# Altium PCB WheelBoard.PcbDoc
Units mil, origin at the board's own origin, x right, y up, seen from the top; angles counter-clockwise.
Board outline 1968.5 x 1181.1 mil, 2 copper layers (Top Layer, Bottom Layer); 35 components, 24 nets, 140 pads, 71 vias.
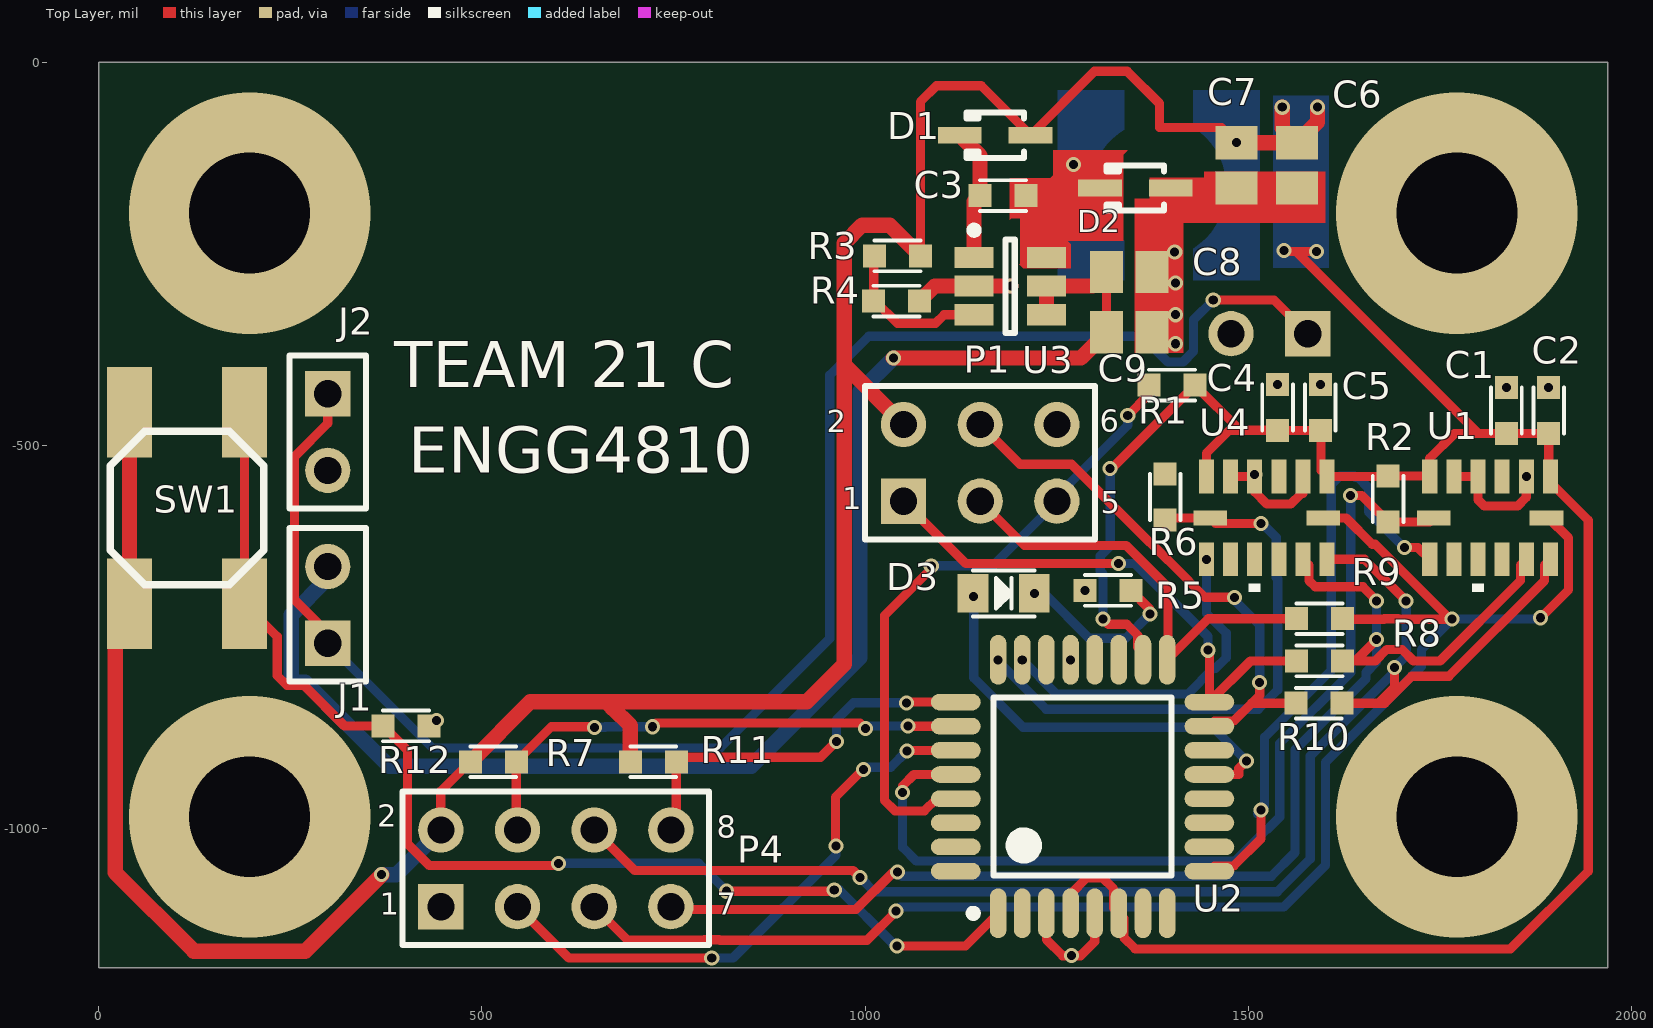
[diagram p0: Top Layer view]
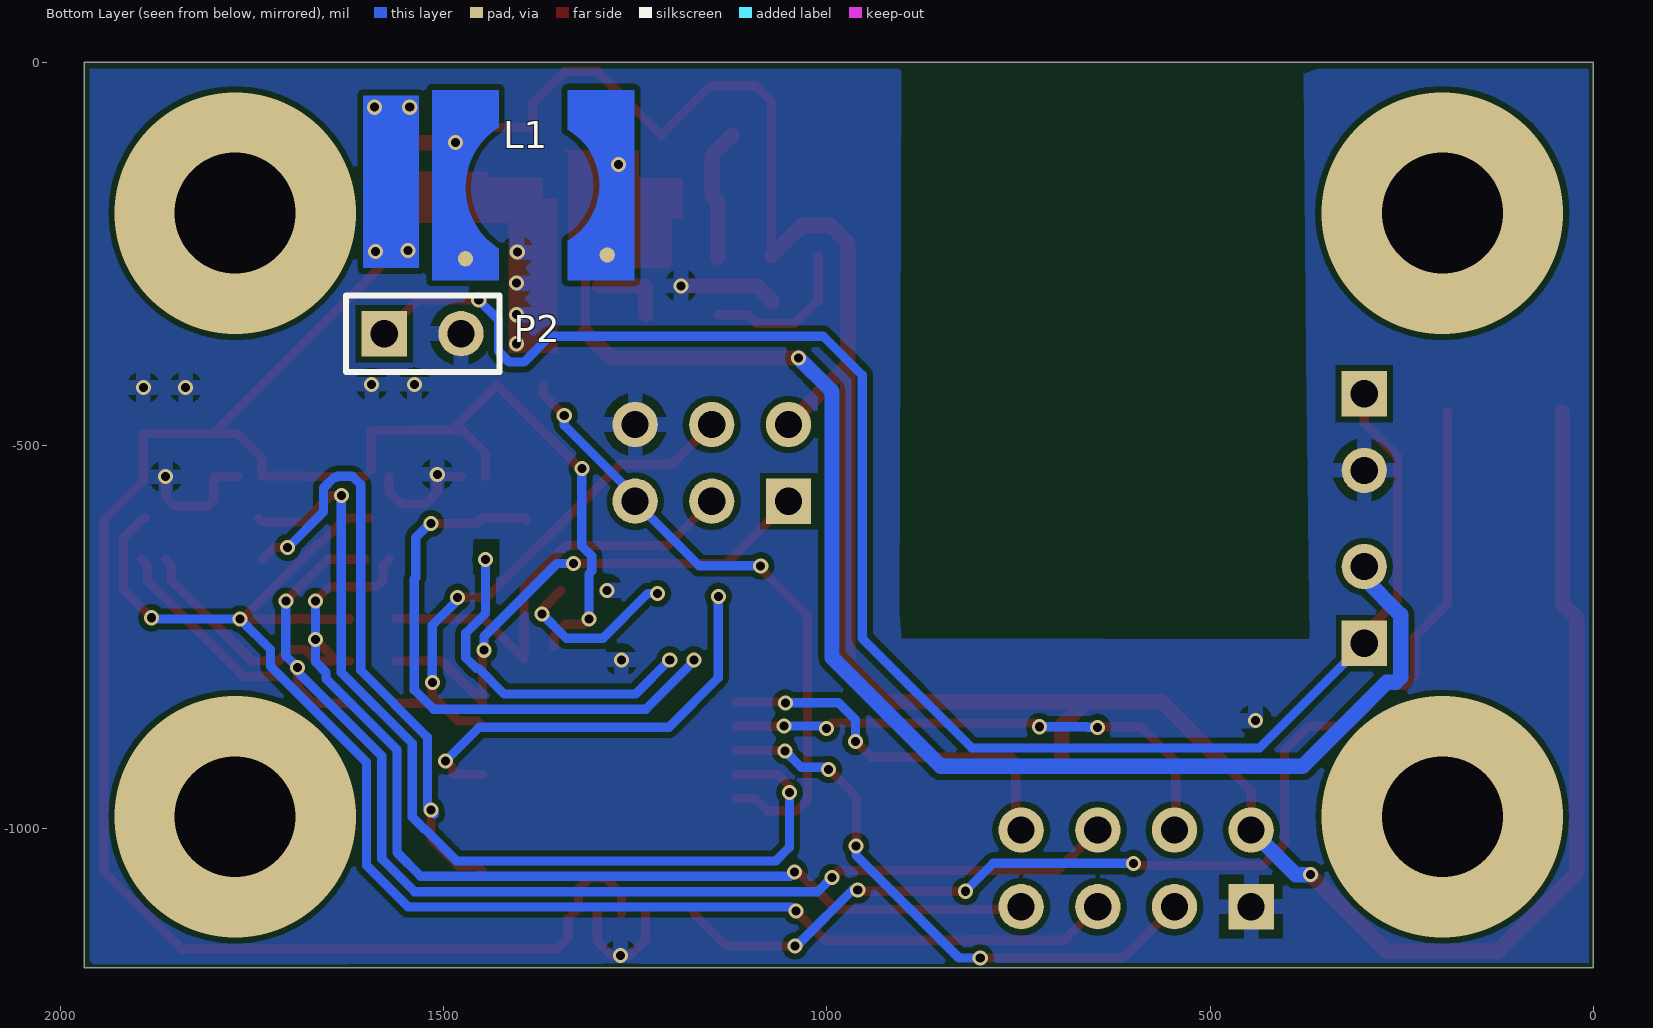
[diagram p1: Bottom Layer view, seen from below]

## Layer stack, top to bottom
Top Layer: signal copper 1.4
Dielectric: dielectric 12.6, FR-4, Dk 4.8
Bottom Layer: signal copper 1.4

## Board outline
0,-1181.1 0,0 1968.5,0 1968.5,-1181.1

## Design rules (kind name [scope] priority, off if disabled: settings)
Clearance [All] p1: gap=7.87
HoleSize [All] p1: absolutevalues=TRUE maxlimit=160 minlimit=11.81 maxpercent=80.000 minpercent=20.000
HoleToHoleClearance [All] p1: gap=5.91 allowstackedmicrovias=TRUE
MinimumSolderMaskSliver [All] p1: minsoldermaskwidth=0.39
PolygonConnect [All] p1: connectstyle=Relief reliefconductorwidth=19.68 reliefentries=4 polygonreliefangle="90 Angle" airgapwidth=11.81
RoutingVias [All] p1: holewidth=11.81 width=19.68 viastyle="Through Hole" minholewidth=11.81 minwidth=19.68 maxholewidth=98.43 maxwidth=118.11
SilkToSilkClearance [All] p1: silktosilkclearance=0.39
SilkToSolderMaskClearance [IsPad] p1: minsilkscreentomaskgap=3.94 clearancetoexposedcopper=TRUE
SolderMaskExpansion [All] p1: expansion=4
Width [All] p1: maxlimit=78.74 minlimit=10 preferedwidth=11.81
23 further rules are at their usual default settings.

## Components (designator, comment, footprint, x,y, rotation, side; value= is the part's Value field where it differs from the comment)
C1 "Cap" 0603E 1836.26,-484.32 r90 top
C2 "Cap" 0603E 1891.37,-484.32 r90 top
C3 "Cap" 0603E 1149.62,-173.92 r0 top
C4 "Cap" 0603E 1537.67,-480.22 r90 top
C5 "Cap" 0603E 1593.48,-480.34 r90 top
C6 "Cap" C0805 1563,-134.55 r90 top
C7 "Cap" C0805 1484.26,-134.55 r90 top
C8 "Cap" C0805 1344.23,-273.66 r0 top
C9 "Cap" C0805 1344.23,-352.4 r0 top
D1 "1SS404" SOD-323 1169.3,-95.18 r180 top
D2 "1SS404" SOD-323 1352.23,-164.05 r180 top
D3 "DIODE" D0805E 1220.47,-692.91 r180 top
J1 "Current J1" HDR1X2 298.79,-757.86 r90 top
J2 "Voltage J2" HDR1X2 298.79,-432.42 r270 top
L1 "Inductor" 5828-INDUCTOR 1251.18,-36.45 r270 bottom
P1 "ISP" HDR2X3 1049.85,-572.61 r0 top
P2 "Power" HDR1X2 1577.05,-354.15 r180 bottom
P4 "NRF Board" HDR2X4 446.33,-1101.54 r0 top
R1 "Res1" 0603E 1370.08,-421.26 r0 top
R2 "Res1" 0603E 1681.98,-539.8 r270 top
R3 "Res1" 0603E 1011.82,-252.66 r0 top
R4 "Res1" 0603E 1070.88,-311.72 r180 top
R5 "Res1" 0603E 1346.46,-688.98 r180 top
R6 "Res1" 0603E 1391.17,-536.96 r270 top
R7 "Res1" 0603E 544.75,-912.56 r180 top
R8 "Res1" 0603E 1562.42,-781.04 r0 top
R9 "Res1" 0603E 1562.42,-725.93 r0 top
R10 "Res1" 0603E 1621.47,-836.16 r180 top
R11 "Res1" 0603E 753.41,-912.56 r180 top
R12 "Res1" 0603E 370.99,-865.8 r0 top
SW1 "SW-SPST" "Switch - SMD" 215.15,-681.5 r90 top
U1 "ADXL375BCCZ" LGA_CC-14-1 1814.96,-594.49 r270 top
U2 "ATmega328-AU" 32A_N 1283.46,-944.88 r90 top
U3 "Buck" SOT23-6 1188.99,-292.03 r0 top
U4 "ADXL375BCCZ" LGA_CC-14-1 1523.62,-594.49 r270 top

## Footprints (in the part's own frame and the unit in brackets; to place one, negate y for a bottom-side part, rotate by r counter-clockwise, add the part's x,y. Pads: shape width x height; smd on the part's side, far side on the other; paste and mask are expansions set on the pad)
32A_N [mm] "Thin QFP, 32-Leads, Body 7x7mm, Pitch 0.8mm, IPC Medium Density"
  oval 1.65x0.55 smd: 1(-4.2,2.8) 2(-4.2,2) 3(-4.2,1.2) 4(-4.2,0.4) 5(-4.2,-0.4) 6(-4.2,-1.2) 7(-4.2,-2) 8(-4.2,-2.8) 17(4.2,-2.8) 18(4.2,-2) 19(4.2,-1.2) 20(4.2,-0.4) 21(4.2,0.4) 22(4.2,1.2) 23(4.2,2) 24(4.2,2.8)
  oval 0.55x1.65 smd: 9(-2.8,-4.2) 10(-2,-4.2) 11(-1.2,-4.2) 12(-0.4,-4.2) 13(0.4,-4.2) 14(1.2,-4.2) 15(2,-4.2) 16(2.8,-4.2) 25(2.8,4.2) 26(2,4.2) 27(1.2,4.2) 28(0.4,4.2) 29(-0.4,4.2) 30(-1.2,4.2) 31(-2,4.2) 32(-2.8,4.2)
  silkscreen extent -4.32,-2.95 2.95,3.75, body extent -3.5,-3.5 3.5,3.5, height 1.2
0603E [mil]
  rect 30x30 smd: 1(0,0) 2(60,0)
  silkscreen extent 0,-20 60,20
5828-INDUCTOR [mil]
  round 20 smd: 1(215,-35) 2(220,-220)
  Top Layer region: 0,-86.61 0,0 248.03,0 248.03,-86.61 196.61,-86.61 165.86,-56.14 124.02,-44.99 82.17,-56.14 51.42,-86.61 51.42,-86.61
  Top Layer region: 0,-263.23 0,-176.61 48.39,-176.61 82.31,-208.65 127.5,-220.3 172.69,-208.65 206.61,-176.61 206.61,-176.61 248.03,-176.61 248.03,-263.23
C0805 [mm] "Chip Capacitor, Body 2.0x1.3mm, IPC High Density"
  rect 1.1x1.4 smd: 1(-0.75,0) 2(0.75,0)
  body extent -1.1,-0.72 1.1,0.72, height 1.4
D0805E [mil]
  rect 40x50 smd: A(80,0) K(0,0)
  silkscreen extent 0,-30 80,30
HDR1X2 [mm] "Connector; Header; 2 Position"
  rect 1.5x1.5 hole 0.9: 1(0,0)
  round 1.5 hole 0.9: 2(2.54,0)
  silkscreen extent -1.27,-1.27 3.81,1.27
HDR2X3 [mm] "Connector; Header; 3x2 Position"
  rect 1.5x1.5 hole 0.9: 1(0,0)
  round 1.5 hole 0.9: 2(0,2.54) 3(2.54,0) 4(2.54,2.54) 5(5.08,0) 6(5.08,2.54)
  silkscreen extent -1.27,-1.27 6.35,3.81
HDR2X4 [mm] "Connector; Header; 4x2 Position"
  rect 1.5x1.5 hole 0.9: 1(0,0)
  round 1.5 hole 0.9: 2(0,2.54) 3(2.54,0) 4(2.54,2.54) 5(5.08,0) 6(5.08,2.54) 7(7.62,0) 8(7.62,2.54)
  silkscreen extent -1.27,-1.27 8.89,3.81
LGA_CC-14-1 [mm]
  rect 1.118x0.5 smd mask+0.025: 1(-1.371,2) 2(-1.371,1.2) 3(-1.371,0.4) 4(-1.371,-0.4) 5(-1.371,-1.2) 6(-1.371,-2) 8(1.371,-2) 9(1.371,-1.2) 10(1.371,-0.4) 11(1.371,0.4) 12(1.371,1.2) 13(1.371,2)
  rect 0.5x1.118 smd mask+0.025: 7(0,-1.871) 14(0,1.871)
  silkscreen extent 2.18,-0.59 2.44,-0.21
SOD-323 [mm] "SOD-323/SC-76; 2 Leads; Body 1.7 x 1.3 mm, (LxW)"
  rect 1.45x0.55 smd: 1(1.175,0) 2(-1.175,0)
  silkscreen extent -0.95,-0.75 0.95,0.75
SOT23-6 [mm]
  rect 1.3x0.7 smd: 1(-1.2,0.95) 2(-1.2,0) 3(-1.2,-0.95) 4(1.2,-0.95) 5(1.2,0) 6(1.2,0.95)
  silkscreen extent -1.32,-1.55 0.15,1.97, body extent -0.9,-1.55 0.9,1.55
"Switch - SMD" [mm]
  rect 3x1.5 smd: 1(-0.635,0.635) 1(5.715,0.635) 2(-0.635,4.445) 2(5.715,4.445)
  silkscreen extent 0,0 5.08,5.08

## Part data
C1 C2 C3 C4 C5 C6 C7 C8 C9: "Capacitor"
D1 D2: library part BA592, "Silicon RF Switching Diode for VHF Band Switching in TV/VTR Tuners"
D3: "Diode"
J1 J2 P2: library part "Header 2", "Header, 2-Pin"
P1: library part "Header 3X2", "Header, 3-Pin, Dual row"
P4: library part "Header 4X2", "Header, 4-Pin, Dual row"
R1 R2 R3 R4 R5 R6 R7 R8 R9 R10 R11 R12: "Resistor"
U1 U4: library part ADXL345BCCZ, "Imported"
U2: "8-bit AVR Microcontroller, 32KB Flash, 1KB EEPROM, 2KB SRAM, 32-pin TQFP, Industrial Grade (-40°C to 85°C)"
U3: library part Component_1

## Via types
v1: diameter 19.68, hole 11.81, Top Layer to Bottom Layer, 67 vias
v2: diameter 314.96, hole 157.48, Top Layer to Bottom Layer, 4 vias

## Nets (pads, with @x,y where several pads share a name; then routed paths per layer and width w, separated by ;. In a path a pad name is that pad's centre, name@x,y a point inside that pad or via, vN(x,y) a via of type N, cw(c..) or ccw(c..) an arc to the next point about the centre after c; other vN are vias at no path point)
ADXL_CSN: R6.2 U2.24 U4.7 | length 759.4
  Top Layer w12: R6.2 1393.64,-594.49 U4.7 1457.16,-601.69 v1(1516.28,-601.69)
  Bottom Layer w12: v1(1173.23,-779.53) 1173.23,-781.57 1235.78,-844.13 1512.75,-844.13 1538.1,-818.78 1538.1,-674.3 1536.13,-672.33 1536.13,-620.05 1517.76,-601.69 v1(1516.28,-601.69)
ADXL_CSN2: R2.2 U1.7 U2.28 | length 1262.2
  Top Layer w12: v1(1048.62,-952.86) 1048.62,-943.94 1063.42,-929.13 U2.28 ; v1(1632.62,-565.26) 1647.44,-565.26 R2.2 1735.99,-599.8 U1.7
  Bottom Layer w12: v1(1048.62,-952.86) 1048.62,-1024.23 1066.38,-1041.99 1482.56,-1041.99 1524.44,-1000.11 1525.17,-1000.11 1540.68,-984.6 1540.68,-888.58 1633.14,-796.11 1633.14,-565.78 v1(1632.62,-565.26)
ADXL_IRQ: U2.23 U4.8 | length 446.9
  Bottom Layer w12: v1(1204.72,-779.53) 1249.45,-824.25 1420.49,-824.25 1454.01,-790.74 1456.79,-790.74 1470.68,-776.85 1470.68,-744.73 1444.88,-718.93 v1(1444.88,-648.46) ; v1@1445,-648.46 v1@1445,-644.79
ADXL_IRQ2: U1.8 U2.9 | length 787.2
  Top Layer w12: U2.9 1455.61,-1048.32 1480.7,-1048.32 1516.15,-1012.87 v1(1516.15,-975.58) ; v1(1703.19,-633.19) 1720.95,-633.19 U1.8
  Bottom Layer w12: v1@1511.5,-980.24 v1(1516.15,-975.58) 1520.8,-970.93 1520.8,-880.35 1607.87,-793.28 1607.87,-551.04 1618.93,-539.98 1638.26,-539.98 1639.82,-541.54 1642.45,-541.54 1656.34,-555.43 1656.34,-586.34 v1(1703.19,-633.19)
GND: C1.2 C2.2 C4.2 C5.2 C6.1 C7.1 C8.2 C9.2 D2.2 J2.2 P1.6 P2.2 P4.1 R4.1 R5.2 R12.2 U1.2 U1.4 U1.5 U2.3 U2.5 U2.21 U3.2 U4.2 U4.4 U4.5 | length 589
  Top Layer w12: U2.3@1236.22,-1107.24 U2.3 1236.22,-1144.36 1257.32,-1165.46 1280.68,-1165.46 1299.21,-1146.93 U2.5 ; U4.5 U4.4 1507.87,-560.49 1523.78,-576.39 1554.96,-576.39 1568.64,-562.71 1570.87,-562.71 U4.2 ; U1.5 U1.4 1799.21,-570.85 1807.22,-578.86 1850.91,-578.86 1862.2,-567.57 v1(1862.2,-540.52)
  Top Layer w20: R4.1 1090.56,-292.03 U3.2 v1@1189.76,-292.03
  other v1: 1269,-1165.46 440.82,-858.65 1267.72,-779.53 1286.46,-688.98 1507.93,-537.68 1836.26,-424.32 1891.37,-424.32 1537.67,-420.22 1593.48,-420.34 1404.46,-367.27 1404.46,-329.4 1190.06,-291.73 1404.63,-288.24 1403.57,-247.69
MISO: P1.1 R8.1 U2.16 | length 692.3
  Top Layer w12: P1.1 1131.19,-653.96 v1(1330.19,-653.96) ; v1(1446.97,-767.02) 1448.82,-768.87 U2.16 1502.42,-781.04 R8.1
  Bottom Layer w12: v1(1330.19,-653.96) 1351.8,-653.96 1446.97,-749.12 v1(1446.97,-767.02)
MISO_ISO: P4.7 R8.2 U1.12 U4.12 | length 1710
  Top Layer w12: P4.7@748.07,-1103.28 749.95,-1105.16 987.74,-1105.16 1036.68,-1056.22 v1(1041.96,-1056.22) ; U4.12 1578.65,-656.24 1578.65,-676.21 1586.77,-684.34 1649.01,-684.34 1667.19,-702.52 v1(1666.79,-702.92) ; R8.2 1638.92,-781.04 ; v1(1666.79,-753.17) 1638.92,-781.04 ; U1.12 1854.43,-656.24 1854.43,-676.21 1749.59,-781.04 1715.04,-781.04 1699.94,-765.94 1680.3,-765.94 1665.2,-781.04 1638.92,-781.04
  Bottom Layer w12: v1(1041.96,-1056.22) 1047.6,-1061.86 1529.66,-1061.86 1560.55,-1030.97 1560.55,-896.81 1653.02,-804.34 1653.02,-796.01 1666.79,-782.24 v1(1666.79,-753.17) v1(1666.79,-702.92)
MOSI: P1.4 R10.2 U2.15 | length 702.6
  Top Layer w12: P1.4 1201.67,-524.44 1269.02,-524.44 1370.42,-625.84 1371.07,-625.84 1421.17,-675.93 1421.17,-676.21 1442.97,-698.02 v1(1481.47,-698.02) ; U2.15 1455.61,-859.35 1480.7,-859.35 1503.89,-836.16 ; v1(1514.38,-808.96) 1514.38,-825.67 1503.89,-836.16 ; R10.2 1503.89,-836.16
  Bottom Layer w12: v1@1481.47,-701.73 1514.38,-734.64 v1(1514.38,-808.96)
MOSI_ISO: P4.6 R10.1 U1.13 U4.13 | length 1915.8
  Top Layer w12: P4.6 699.13,-1054.34 984,-1054.34 v1(992.98,-1063.32) ; U4.13 1651.02,-648.46 v1(1705.47,-702.92) ; R10.1 1669.34,-836.16 ; v1(1690.12,-789.66) 1690.12,-815.38 1669.34,-836.16 ; U1.13 1885.92,-656.24 1885.92,-676.21 1761.22,-800.92 1712.66,-800.92 1677.41,-836.16 1669.34,-836.16
  Bottom Layer w12: v1(992.98,-1063.32) 1011.8,-1082.14 1537.49,-1082.14 1580.43,-1039.2 1580.43,-905.04 1690.12,-795.35 v1(1690.12,-789.66) 1705.47,-774.31 v1(1705.47,-702.92)
NetC3_1: C3.1 D1.1 U3.1 | length 173.7
  Top Layer w20: D1.1 1149.62,-121.76 C3.1 1141.74,-181.8 U3.1
NetC3_2: C3.2 D2.1 L1.1 U3.6
  other v1: 1271.3,-133.29
NetD3_A: D3.A U2.13 | length 566.9
  Top Layer w12: U2.13 1487.1,-929.13 1487.1,-921.27 v1(1496.97,-911.39)
  Bottom Layer w12: v1(1141.38,-696.71) 1141.38,-803.02 1205.77,-867.41 1452.98,-867.41 v1(1496.97,-911.39)
NetD3_K: D3.K R5.1 | length 229.4
  Top Layer w12: R5.1 1371.29,-713.81 v1(1371.29,-719.8)
  Bottom Layer w12: v1(1220.47,-692.91) 1233.25,-692.91 1291.86,-751.52 1339.57,-751.52 v1(1371.29,-719.8)
NetR3_1: R3.1 R4.2 U3.3 | length 205.6
  Top Layer w12: R3.1@1010.88,-253.61 R4.2 1013.13,-311.72 1042,-340.59 1091.63,-340.59 1102.78,-329.43 U3.3
NetR12_1: R12.1 SW1.1 U2.1 | length 1529.5
  Top Layer w12: SW1.1@190.15,-456.5 190.15,-706.5 232.9,-749.24 232.9,-800.12 245.68,-812.9 267.83,-812.9 320.73,-865.8 R12.1 402.92,-897.73 402.92,-1019.52 431.24,-1047.83 597.02,-1047.83 v1(599.87,-1044.98) ; v1(819.07,-1081.44) v1@954.61,-1081.44 ; v1@957.99,-1078.06 v1(959.5,-1079.57) ; v1(1041.5,-1152.65) 1130.81,-1152.65 U2.1
  Bottom Layer w12: v1(599.87,-1044.98) 782.61,-1044.98 v1(819.07,-1081.44) ; v1(959.5,-1079.57) 966.08,-1079.57 1034.84,-1148.33 v1@1034.84,-1149.33
NRF_CE: P4.3 U2.27 | length 754.6
  Top Layer w12: P4.3 613.29,-1168.51 v1(799.66,-1168.51) ; v1@961,-1021.4 961,-958.82 v1(997.39,-922.43) ; v1@1055.21,-897.64 U2.27
  Bottom Layer w12: v1(799.66,-1168.51) 827.43,-1168.51 961.87,-1034.07 v1(961.87,-1022.27) ; v1(997.39,-922.43) 1000.26,-919.56 1033.29,-919.56 v1(1054.36,-898.49)
NRF_CSN: P4.4 R7.1 U2.26 | length 686.8
  Top Layer w12: P4.4 544.75,-999.97 R7.1 590.49,-866.83 v1@645.9,-866.83 ; v1(722.39,-866.83) 727.09,-862.13 993.02,-862.13 v1(1000.09,-869.2) ; v1(1055.66,-865.8) 1056,-866.14 U2.26
  Bottom Layer w12: v1(646.68,-867.6) 660.39,-867.6 ; 661.17,-866.83 v1(722.39,-866.83) ; v1(1000.09,-869.2) 1003.49,-865.8 v1(1055.66,-865.8)
NRF_IRQ: P4.8 R11.1 U2.25 | length 503.9
  Top Layer w12: P4.8 753.41,-994.45 R11.1 759.31,-906.66 941.55,-906.66 v1(962.36,-885.85) ; v1@1054.84,-834.65 U2.25
  Bottom Layer w12: v1(962.36,-885.85) 962.36,-857.89 984.65,-835.61 v1(1053.88,-835.61)
RST: P1.5 R1.1 U2.29 | length 825.7
  Top Layer w12: v1@1086.05,-660.76 1024.9,-721.91 1024.9,-962.69 1038.79,-976.58 1077.07,-976.58 1093.02,-960.63 U2.29 ; v1(1342.3,-461.03) 1370.08,-433.26 R1.1
  Bottom Layer w12: v1(1086.05,-656.92) 1166.43,-656.92 P1.5@1249.85,-573.5 ; P1.5@1249.85,-566.02 1342.3,-473.56 v1(1342.3,-461.03)
SCK: P1.3 R9.1 U2.17 | length 573.9
  Top Layer w12: P1.3 1207.48,-630.24 1340.01,-630.24 1395.01,-685.24 1395.01,-778.22 1447.3,-725.93 R9.1
SCK_ISO: P4.5 R9.2 U1.14 U4.14 | length 2041.2
  Top Layer w12: P4.5 690.12,-1145.33 789.3,-1145.33 789.84,-1144.79 809.48,-1144.79 810.02,-1145.33 1002.22,-1145.33 v1(1040.2,-1107.36) ; U4.14 1627.05,-594.49 1661.23,-628.67 1664.97,-628.67 v1@1762.22,-725.93 ; R9.2 1623.13,-726.64 1676.61,-726.64 1677.32,-725.93 1694.94,-725.93 1695.65,-726.64 1761.51,-726.64 v1@1762.22,-725.93 ; v1(1765.34,-726.45) 1762.74,-726.45 v1@1762.22,-725.93 ; v1(1880.84,-724.7) 1917.42,-688.12 1917.42,-620.71 1891.2,-594.49 U1.14
  Bottom Layer w12: v1(1040.2,-1107.36) 1045.53,-1102.02 1545.72,-1102.02 1600.3,-1047.44 1600.3,-913.27 1725.35,-788.23 1725.35,-766.45 v1(1765.34,-726.45) 1879.09,-726.45 v1(1880.84,-724.7)
VCC: C8.1 C9.1 J1.2 U3.4 U3.5 | length 1889.7
  Top Layer w12: C9.1 C8.1
  Top Layer w20: v1(1036.62,-385.77) 1281.33,-385.77 C9.1 ; U3.4 U3.5 C8.1@1296.33,-292.03
  Bottom Layer w20: J1.2 298.79,-673.52 251.38,-720.92 251.38,-802.42 257.86,-808.9 269.48,-808.9 378.84,-918.25 851.64,-918.25 993.16,-776.73 993.16,-429.23 v1(1036.62,-385.77)
VCC_IN: J1.1 J2.1 P2.1 | length 2209.4
  Top Layer w12: J1.1 298.79,-744.66 255.38,-701.26 255.38,-514.44 298.79,-471.04 J2.1 ; v1(1453.86,-310.35) 1533.25,-310.35 P2.1
  Bottom Layer w12: J1.1 435.25,-894.32 435.25,-894.38 810.99,-894.38 953.72,-751.65 953.72,-408.17 1004.47,-357.42 1361.07,-357.42 1394.64,-390.98 1414.28,-390.98 1428.18,-377.09 1428.18,-336.03 v1(1453.86,-310.35)
VREG-3.3: C1.1 C2.1 C4.1 C5.1 C6.2 C7.2 D1.2 L1.2 P1.2 P4.2 R1.2 R2.1 R3.2 R7.2 R11.2 SW1.2 U1.1 U1.6 U2.4 U2.6 U2.18 U4.1 U4.6 | length 6449.9
  Top Layer w12: P4.2 446.33,-950.99 R7.2 ; R3.2 1071.82,-51.81 1092.91,-30.72 1151.1,-30.72 D1.2 1298.93,-11.81 1341.59,-11.81 ; U2.4 1267.72,-1085.15 1288.98,-1063.88 1309.44,-1063.88 1323.91,-1078.35 1323.91,-1103.44 U2.6 ; v1(1309.99,-726.16) 1317,-733.17 1340.94,-733.17 1355.41,-747.64 U2.18@1355.41,-762.73 ; v1@1321.29,-530.05 R1.2 1489.03,-480.22 ; U2.6@1337.5,-1117.03 1337.5,-1142.12 1351.97,-1156.59 1841.65,-1156.59 1943.01,-1055.23 1943.01,-597.41 1891.37,-545.78 C2.1 C1.1 1768.45,-484.32 1736.22,-516.55 U1.6 ; 1343.17,-13.39 1383.72,-53.95 1383.72,-85.31 1464.55,-85.31 v1(1484.26,-105.02) ; U4.6 1444.88,-510.22 1474.89,-480.22 1489.03,-480.22 ; v1(1546.1,-245.59) 1547.38,-246.88 1562.13,-246.88 ; v1(1588.49,-246.88) 1562.13,-246.88 ; U4.1@1594.58,-532.74 1594.58,-481.45 C5.1 1537.79,-480.34 C4.1 1489.03,-480.22 ; U4.1 R2.1@1681.27,-540.52 ; R2.1 U1.6@1735.5,-539.8 ; 1799.57,-484.32 1562.13,-246.88
  Top Layer w20: SW1.2@40.15,-456.5 40.15,-706.5 21.5,-725.15 21.5,-1056.89 124.22,-1159.61 269.48,-1159.61 v1@369.02,-1060.07 ; R7.2 563.1,-834.21 661.62,-834.21 ; R11.2 693.41,-865.54 670.39,-842.52 669.93,-842.52 661.62,-834.21 ; P1.2 972.54,-395.3 ; R3.2 1031.76,-212.6 995.93,-212.6 972.54,-236 972.54,-395.3 ; v1(1484.26,-105.02) C6.2 ; v1(1543.83,-58.73) 1543.83,-85.85 C6.2 ; v1(1589.88,-58.73) 1589.88,-78.15 C6.2 ; 661.62,-834.21 923.64,-834.21 972.54,-785.31 972.54,-395.3
  Bottom Layer w12: v1@1310.17,-725.98 1310.17,-667.48 1306.47,-663.78 1306.47,-644.13 1319.36,-631.25 v1(1319.36,-530.05)
  Bottom Layer w20: v1(368.66,-1059.7) 388.16,-1059.7 P4.2
pads on no net: R6.1 U1.3 U1.9 U1.10 U1.11 U2.2 U2.7 U2.8 U2.10 U2.11 U2.12 U2.14 U2.19 U2.20 U2.22 U2.30 U2.31 U2.32 U4.3 U4.9 U4.10 U4.11
copper on no net:
  other v2: 196.85,-984.25 1771.65,-984.25 196.85,-196.85 1771.65,-196.85

## Polygon pours and split planes (outlines as drawn)
GND on Bottom Layer "Bottom Layer-No Net" (solid, pour order 14): 5.79,-1174.66 5.79,-10.72 8.21,-8.3 1961.03,-8.3 1961.03,-1172.24 1956.19,-1177.08

## Other copper
Top Layer:
  region net GND: 1414.6,-378.97 1351.61,-378.97 1351.61,-178.19 1371.29,-178.19 1371.29,-150.63 1442.16,-150.63 1442.16,-142.75 1599.64,-142.75 1599.64,-209.68 1414.6,-209.68
  region net NetC3_2: 1188.69,-151.19 1241.47,-151.19 1245.14,-147.52 1245.14,-114.93 1341.52,-114.93 1341.98,-115.39 1336.47,-120.9 1336.47,-232.88 1263.5,-232.88 1268.09,-237.47 1268.09,-268.68 1206.13,-268.68 1201.08,-263.63 1202,-262.71 1202,-203.51 1190.53,-203.51 1188.69,-205.34
Bottom Layer:
  region net VREG-3.3: 1604.54,-43.28 1531.97,-43.28 1531.97,-268.72 1604.54,-268.72
  pour cut-out: 369.97,-753 902.56,-751.5 905.29,-715.98 902.56,-8.43 359.43,-8.4 377.49,-15.26 374.48,-384.88
  pour cut-out: 1426.37,-621.31 1426.18,-668.68 1427.53,-670.03 1428.88,-668.68 1461.39,-668.68 1461.31,-621.66 1454.16,-621.64

## Silkscreen, mask and mechanical layers (free items; w line width, h text height)
Top Overlay:
  text "TEAM 21 C" at 385.26,-424.19 h60
  text "ENGG4810" at 403.99,-535.68 h60
Mechanical 1:
  the board outline again, w10

## Text inside footprints (layer, text, board x,y; h text height)
P1: Top Overlay "6" at 1305.47,-491.9 h50; Top Overlay "5" at 1307.09,-598.43 h50; Top Overlay "2" at 949.85,-492.61 h50; Top Overlay "1" at 969.85,-592.61 h50
P4: Top Overlay "2" at 363.65,-1007.05 h50; Top Overlay "1" at 366.33,-1121.54 h50; Top Overlay "7" at 806.33,-1121.54 h50; Top Overlay "8" at 806.33,-1021.54 h50